# Altium PCB PCB1.PcbDoc
Units mm, origin at the board's own origin, x right, y up, seen from the top; angles counter-clockwise.
Board outline 32.2 x 66.19 mm, 2 copper layers (Top Layer, Bottom Layer); 14 components, 9 nets, 218 pads, 60 vias.
Unrouted connection lines stored in the file: 17.
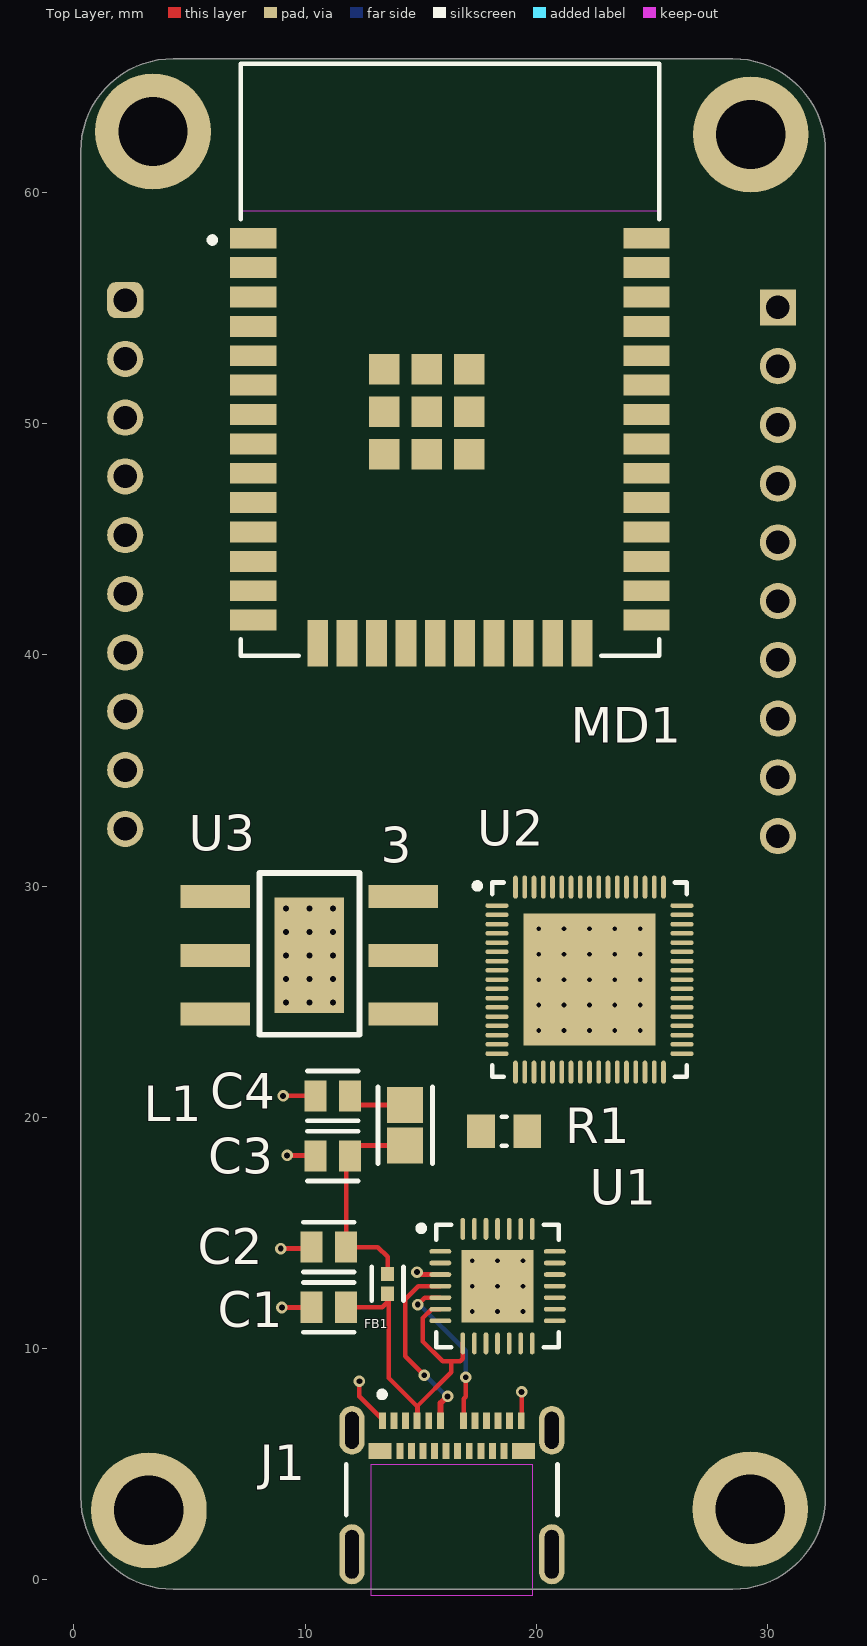
[diagram p0: Top Layer view]
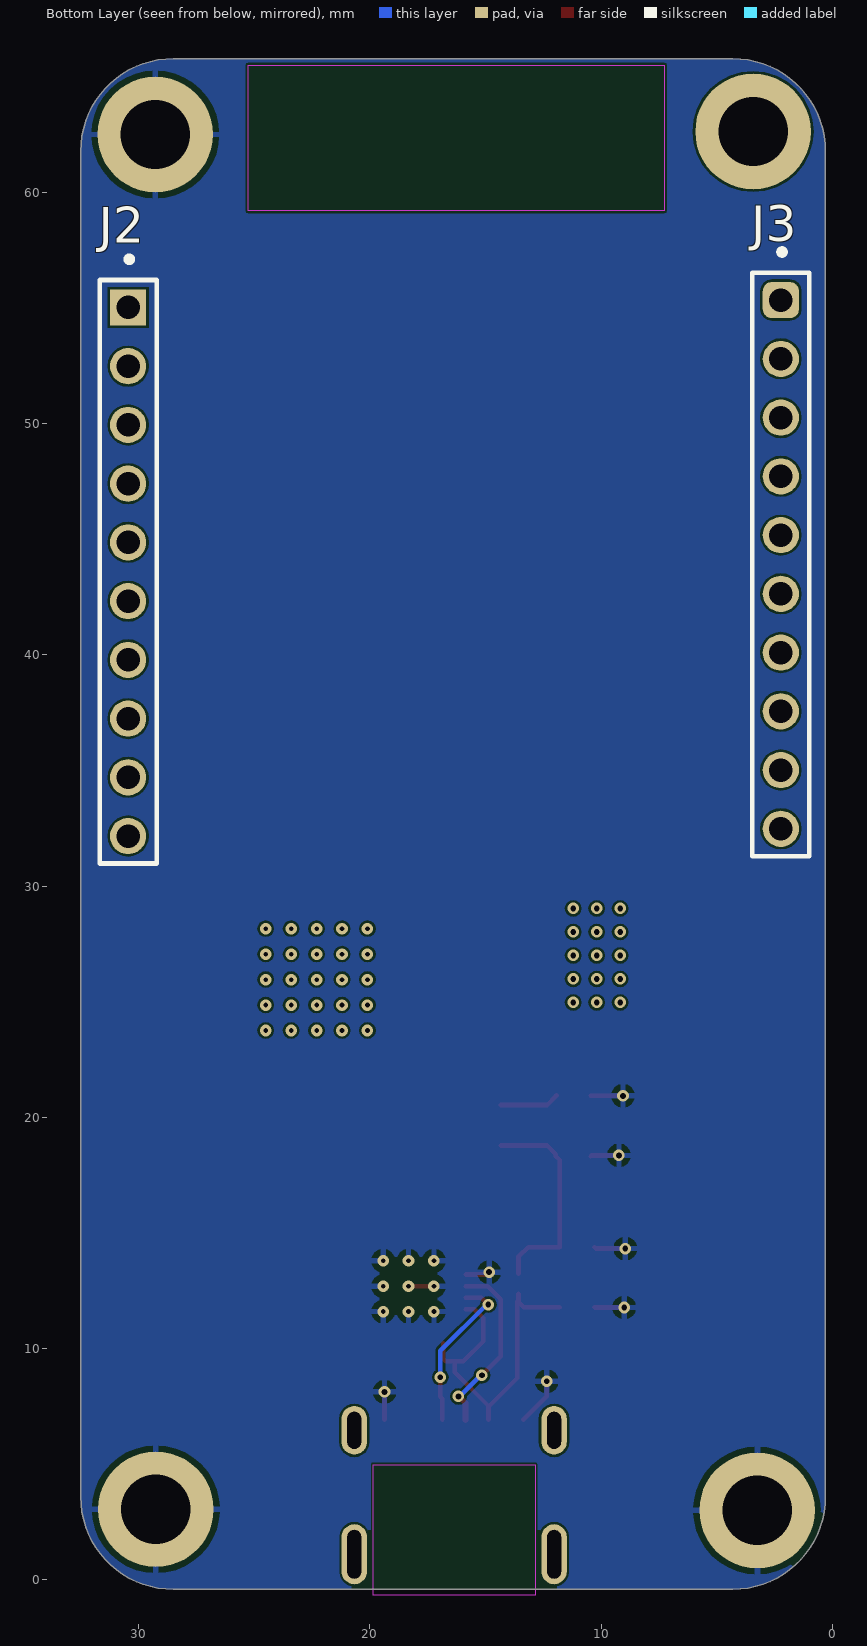
[diagram p1: Bottom Layer view, seen from below]

## Layer stack, top to bottom
Top Solder: solder mask 0.0254, SM-002, Dk 4
Top Layer: signal copper 0.0356
Dielectric 1: dielectric 0.32, FR-4, Dk 4.8
Bottom Layer: signal copper 0.0356
Bottom Solder: solder mask 0.0254, SM-002, Dk 4

## Board outline
0.3,3.59 0.3,61.775 cw(c4.3,61.775) 4.3,65.775 28.5,65.775 cw(c28.5,61.775) 32.5,61.775 32.5,3.59 cw(c28.5,3.59) 28.5,-0.41 4.3,-0.41 cw(c4.3,3.59)

## Design rules (kind name [scope] priority, off if disabled: settings)
Clearance [All] p1: gap=0.1 ignorepadtopadclearanceinfootprint=TRUE except(0: Arc-Hole Track-Hole SMDPad-Hole THPad-Hole Via-Hole Fill-Hole Poly-Hole Region-Hole Text-Hole)
HoleSize [All] p1: absolutevalues=TRUE maxlimit=5 minlimit=0.025 maxpercent=80.000 minpercent=20.000
MinimumSolderMaskSliver [All] p1: minsoldermaskwidth=0.1
PolygonConnect [All] p1: connectstyle=Relief reliefconductorwidth=0.254 reliefentries=4 polygonreliefangle="90 Angle" airgapwidth=0.254
RoutingVias [All] p1: holewidth=0.25 width=0.5 viastyle="Through Hole" minholewidth=0.25 minwidth=0.5 maxholewidth=0.25 maxwidth=0.5
SilkToSolderMaskClearance [IsPad] p1: minsilkscreentomaskgap=0.1 clearancetoexposedcopper=TRUE
SolderMaskExpansion [All] p1: expansion=0.102 istentingtop=FALSE
UnRoutedNet [All] p1: checkbadconnections=TRUE
Width [All] p1: maxlimit=0.75 minlimit=0.1 preferedwidth=0.2 minimp=50.000000 maximp=50.000000 favimp=50.000000
26 further rules are at their usual default settings.

## Components (designator, comment, footprint, x,y, rotation, side; value= is the part's Value field where it differs from the comment)
3 "LDO_AMS1117" PCBComponent_1 9.3,28.525 r0 top
C1 "C0805C104K5RACTU" FP-C0805C-DN-MFG 11.031,11.782 r180 top value="0.10 μF"
C2 "C0805C104K5RACTU" FP-C0805C-DN-MFG 11.031,14.386 r180 top value="0.10 μF"
C3 "C0805C104K5RACTU" FP-C0805C-DN-MFG 11.201,18.322 r180 top value="0.10 μF"
C4 "C0805C104K5RACTU" FP-C0805C-DN-MFG 11.201,20.926 r180 top value="0.10 μF"
FB1 "BLM15AG102SN1D" FP-BLM15-0_05-IPC_B 13.571,12.798 r90 top
J1 "1054500101" FP-1054500101-MFG 16.35,3.105 r0 top
J2 "4-644456-0" FP-4-644456-0-MFG#1 30.45,43.59 r90 bottom
J3 "4-644456-0" FP-4-644456-0-MFG#2 2.225,43.905 r90 bottom
L1 "LQM21NNR10K10D" FP-LQM21DN_00-IPC_A 14.333,19.656 r90 top
MD1 "ESP32-WROOM-32D" FP-ESP32-WROOM-32D-MFG 16.265,52.75 r0 top
R1 "RC0805FR-0710RL" RESC2013X60X35ML10T20 18.614,19.4 r180 top
U1 "CP2102-GMR" SLAB-QFN-28-3125x3125TP_M 18.325,12.7 r0 top
U2 "CY8C5888LTI-LP097" CYP-LTX68_M 22.3,25.954 r0 top

## Footprints (in the part's own frame and the unit in brackets; to place one, negate y for a bottom-side part, rotate by r counter-clockwise, add the part's x,y. Pads: shape width x height; smd on the part's side, far side on the other; paste and mask are expansions set on the pad)
CYP-LTX68_M [mm] "QFN, 68-Leads, Body 8x8mm, Pitch 0.4mm, Thermal Pad 5.7x5.7mm, IPC Low Density"
  oval 1x0.2 smd: 1(-4,3.2) 2(-4,2.8) 3(-4,2.4) 4(-4,2) 5(-4,1.6) 6(-4,1.2) 7(-4,0.8) 8(-4,0.4) 9(-4,0) 10(-4,-0.4) 11(-4,-0.8) 12(-4,-1.2) 13(-4,-1.6) 14(-4,-2) 15(-4,-2.4) 16(-4,-2.8) 17(-4,-3.2) 35(4,-3.2) 36(4,-2.8) 37(4,-2.4) 38(4,-2) 39(4,-1.6) 40(4,-1.2) 41(4,-0.8) 42(4,-0.4) 43(4,0) 44(4,0.4) 45(4,0.8) 46(4,1.2) 47(4,1.6) 48(4,2) 49(4,2.4) 50(4,2.8) 51(4,3.2)
  oval 0.2x1 smd: 18(-3.2,-4) 19(-2.8,-4) 20(-2.4,-4) 21(-2,-4) 22(-1.6,-4) 23(-1.2,-4) 24(-0.8,-4) 25(-0.4,-4) 26(0,-4) 27(0.4,-4) 28(0.8,-4) 29(1.2,-4) 30(1.6,-4) 31(2,-4) 32(2.4,-4) 33(2.8,-4) 34(3.2,-4) 52(3.2,4) 53(2.8,4) 54(2.4,4) 55(2,4) 56(1.6,4) 57(1.2,4) 58(0.8,4) 59(0.4,4) 60(0,4) 61(-0.4,4) 62(-0.8,4) 63(-1.2,4) 64(-1.6,4) 65(-2,4) 66(-2.4,4) 67(-2.8,4) 68(-3.2,4)
  rect 5.7x5.7 smd: 69(0,0)
  silkscreen extent -4.97,-4.2 4.2,4.2, body extent -4.05,-4.05 4.05,4.05, height 1
FP-4-644456-0-MFG#1 [mil]
  rect 61.65x61.65 hole 40 paste-39370.1 mask+0: 1(450,0)
  round 61.65 hole 40 paste-39370.1 mask+0: 2(350,0) 3(250,0) 4(150,0) 5(50,0) 6(-50,0) 7(-150,0) 8(-250,0) 9(-350,0) 10(-450,0)
  silkscreen extent -497,-49 537,49, body extent -494,-46 494,46, height 408
FP-4-644456-0-MFG#2 [mil]
  rrect50% 61.65x61.65 hole 40 paste-39370.1 mask+0: 1(450,0)
  round 61.65 hole 40 paste-39370.1 mask+0: 2(350,0) 3(250,0) 4(150,0) 5(50,0) 6(-50,0) 7(-150,0) 8(-250,0) 9(-350,0) 10(-450,0)
  silkscreen extent -497,-49 537,49, body extent -494,-46 494,46, height 408
FP-1054500101-MFG [mm]
  rrect100% 1.1x2.1 hole 1.6 slot 0.6 at 0 deg paste-1000 mask+0: 1(-4.32,3.36) 2(4.32,3.36)
  rrect100% 1.1x2.6 hole 2.1 slot 0.6 at 0 deg paste-1000 mask+0: 3(-4.32,-2) 4(4.32,-2)
  rect 0.3x0.7 smd paste+0 mask+0: A1(-3,3.77) A2(-2.5,3.77) A3(-2,3.77) A4(-1.5,3.77) A5(-1,3.77) A6(-0.5,3.77) A7(0.5,3.77) A8(1,3.77) A9(1.5,3.77) A10(2,3.77) A11(2.5,3.77) A12(3,3.77) B2(2.25,2.47) B3(1.75,2.47) B4(1.25,2.47) B5(0.75,2.47) B6(0.25,2.47) B7(-0.25,2.47) B8(-0.75,2.47) B9(-1.25,2.47) B10(-1.75,2.47) B11(-2.25,2.47)
  rect 1x0.7 smd paste+0 mask+0: B1(3.1,2.47) B12(-3.1,2.47)
  Keep-Out Layer region: -3.5,-3.77 3.5,-3.77 3.5,1.88 -3.5,1.88
  silkscreen extent -4.57,-0.3 4.57,5.03
FP-BLM15-0_05-IPC_B [mm]
  rect 0.615x0.572 smd paste+0 mask+0.03: 1(-0.429,0) 2(0.429,0)
  silkscreen extent -0.74,-0.69 0.74,0.69, body extent -0.89,-0.44 0.89,0.44, height 0.25
FP-C0805C-DN-MFG [mm]
  rect 0.95x1.35 smd paste+0 mask+0: 1(-0.75,0) 2(0.75,0)
  silkscreen extent -1.1,-1.07 1.1,1.07, body extent -1.4,-0.85 1.4,0.85, height 0.25
FP-ESP32-WROOM-32D-MFG [mm]
  rect 2x0.9 smd paste+0 mask+0: 1(-8.5,5.26) 2(-8.5,3.99) 3(-8.5,2.72) 4(-8.5,1.45) 5(-8.5,0.18) 6(-8.5,-1.09) 7(-8.5,-2.36) 8(-8.5,-3.63) 9(-8.5,-4.9) 10(-8.5,-6.17) 11(-8.5,-7.44) 12(-8.5,-8.71) 13(-8.5,-9.98) 14(-8.5,-11.25) 25(8.5,-11.25) 26(8.5,-9.98) 27(8.5,-8.71) 28(8.5,-7.44) 29(8.5,-6.17) 30(8.5,-4.9) 31(8.5,-3.63) 32(8.5,-2.36) 33(8.5,-1.09) 34(8.5,0.18) 35(8.5,1.45) 36(8.5,2.72) 37(8.5,3.99) 38(8.5,5.26)
  rect 0.9x2 smd paste+0 mask+0: 15(-5.715,-12.25) 16(-4.445,-12.25) 17(-3.175,-12.25) 18(-1.905,-12.25) 19(-0.635,-12.25) 20(0.635,-12.25) 21(1.905,-12.25) 22(3.175,-12.25) 23(4.445,-12.25) 24(5.715,-12.25)
  rect 1.33x1.33 smd paste+0 mask+0: 39(-2.835,-4.075) 39(-2.835,-2.24) 39(-2.835,-0.405) 39(-1,-4.075) 39(-1,-2.24) 39(-1,-0.405) 39(0.835,-4.075) 39(0.835,-2.24) 39(0.835,-0.405)
  Keep-Out Layer region: -9,6.45 9,6.45 9,12.75 -9,12.75
  Keep-Out Layer region: -9,6.45 9,6.45 9,12.75 -9,12.75
  silkscreen extent -10.4,-12.8 9.05,12.8, body extent -9.6,-13.35 9.6,12.9, height 0.25
FP-LQM21DN_00-IPC_A [mm]
  rect 1.554x1.556 smd paste+0 mask+0: 1(-0.876,0) 2(0.876,0)
  silkscreen extent -1.65,-1.18 1.65,1.18, body extent -2.15,-1.28 2.15,1.28, height 0.25
PCBComponent_1 [mm]
  rect 3x1 smd: 1(-3.175,-1.524) 1(-3.175,1.016) 2(-3.175,-4.064) 2(4.953,-4.064) 3(4.953,-1.524) 3(4.953,1.016)
  rect 3x5 smd: 3(0.889,-1.524)
  silkscreen extent -1.27,-4.95 3.05,2.03
RESC2013X60X35ML10T20 [mm] "Chip Resistor, 2-Leads, Body 2.1x1.35mm, IPC Low Density"
  rect 1.2x1.45 smd mask+0.05: 1(-1,0) 2(1,0)
  silkscreen extent -0.1,-0.63 0.1,0.63, body extent -1.05,-0.68 1.05,0.67, height 0.6
SLAB-QFN-28-3125x3125TP_M [mm] "QFN, 28-Leads, Body 5x5mm, Pitch 0.5mm, Thermal Pad 3.13x3.13mm, IPC Low Density"
  oval 0.95x0.2 smd mask+0.05: 1(-2.475,1.5) 2(-2.475,1) 3(-2.475,0.5) 4(-2.475,0) 5(-2.475,-0.5) 6(-2.475,-1) 7(-2.475,-1.5) 15(2.475,-1.5) 16(2.475,-1) 17(2.475,-0.5) 18(2.475,0) 19(2.475,0.5) 20(2.475,1) 21(2.475,1.5)
  oval 0.2x0.95 smd mask+0.05: 8(-1.5,-2.475) 9(-1,-2.475) 10(-0.5,-2.475) 11(0,-2.475) 12(0.5,-2.475) 13(1,-2.475) 14(1.5,-2.475) 22(1.5,2.475) 23(1,2.475) 24(0.5,2.475) 25(0,2.475) 26(-0.5,2.475) 27(-1,2.475) 28(-1.5,2.475)
  rect 3.13x3.13 smd: 29(0,0)
  silkscreen extent -3.42,-2.65 2.65,2.65, body extent -2.5,-2.5 2.5,2.5, height 1

## Part data
C1 C2 C3 C4: library part CMP-2007-00279-2, "CAP CER 0.1UF 50V X7R 0805", Capacitance="0.10 μF", Manufacturer=KEMET, Package=C0805C-DN, Temperature="-55°C to +125°C", Temperature Characteristic=X7R, Temperature Coefficient=30ppm/°C, Temperature Range High=+125°C, Temperature Range Low=-55°C, Tolerance=0.1, Voltage Rating="50 V", Automotive=No, Category=Cap, ComponentLink2Description=Datasheet, ComponentLink2URL=https://content.kemet.com/datasheets/KEM_C1003_C0G_SMD.pdf, Device Class L1="Passive Components", Device Class L2=Capacitors, Device Class L3="Ceramic Capacitors", Digikey Description="CAP CER 0.1UF 50V X7R 0805", Height=0.88mm, Ipc Land Pattern Name=CAPC200125X78, Lead Free=Yes, Manufacturer Part Number=C0805C104K5RACTU, Material=Ceramic, Mouser Description="Cap Ceramic 0.1uF 50V X7R 10% SMD 2.0 x 1.2 mm 125 C Paper T/R", Octopart=https://octopart.com/c0805c104k5ractu-kemet-143926, RoHS=TRUE
FB1: library part CMP-0686-00181-5, "Chip Ferrite Bead, 0402, 1000Ω @ 100MHz, 0.65Ω, 25%, 300mA", Case Code (Imperial)=0402, Case Code (Metric)=1005, Current Rating=300mA, DC Current=200mA, DC Resistance (DCR)=650mR, DC Resistance-Max=1R, Frequency=100MHz, Max Operating Temperature=125°C, Min Operating Temperature=-55°C, Package Quantity=1, Tolerance=25%, Case/Package=0402, Core Material=Ferrite, Depth=0.55mm, Height=0.5mm, Impedance=1kR, Lead Free="Lead Free", Length=1mm, Material=Ferrite, Max Current Rating=300mA, Max DC Current=200mA, Military Standard=Not, Number of Circuits=1, Number of Lines=1, Number of Pins=2, Packaging="Tape and Reel", Radiation Hardening=No, REACH SVHC="No SVHC", RoHS Compliant=Yes, Series=BLM15AG_SN, Shielding=Unshielded, Termination=SMD/SMT, Test Frequency=100MHz, Width=0.5mm
J1: library part CMP-04767-000004-1, "CONN RCP USB3.1 TYPEC 24P SMD RA", Current Rating=0.25/1.25/5A, Manufacturer=Molex, Package=0, Temperature="-30°C to +85°C", Temperature Range High=+85°C, Temperature Range Low=-30°C, Voltage Rating=30V, Automotive=No, Category=Conn, ComponentLink2Description=Datasheet, ComponentLink2URL=https://www.molex.com/webdocs/datasheets/pdf/en-us/1054500101_IO_CONNECTORS.pdf, Conn Orientation="Right Angle", Contact Material=Gold,Nickel, Device Class L1=Connectors, Device Class L2="USB Connectors", Device Class L3=unset, Digikey Description="CONN RCP USB3.1 TYPEC 24P SMD RA", Footprint Url=https://www.molex.com/pdm_docs/sd/1054500101_sd.pdf, Height=3.44mm, Is Female=yes, Lead Free=Yes, Manufacturer Part Number=1054500101, Mouser Description="USB Shielded I/O Receptacle; Type C; Right Angle; Surface Mount; Gold over Nickel", Number Of Contacts=24, Octopart=https://octopart.com/105450-0101-molex-68082325, Pitch=0.5mm, RoHS=TRUE, Shielding=true, Usb Standard="USB 3.1"
J2 J3: library part CMP-03369-000038-1, "CONN HEADER VERT 10POS 2.54MM", Current Rating=5A, Manufacturer="TE Connectivity", Temperature="-55°C to +105°C", Temperature Range High=+105°C, Temperature Range Low=-55°C, Voltage Rating=250V, Automotive=No, Category=Conn, ComponentLink2Description=Datasheet, ComponentLink2URL=https://www.te.com/commerce/DocumentDelivery/DDEController?Action=showdoc&DocId=Data+Sheet%7F82056_MTA%7F0818%7Fpdf%7FEnglish%7FENG_DS_82056_MTA_0818.pdf%7F4-644456-0, Conn Gender=Male, Conn Orientation=Vertical, Contact Material=Tin, Device Class L1=Connectors, Device Class L2="Headers and Wire Housings", Device Class L3=unset, Digikey Description="CONN HEADER VERT 10POS 2.54MM", Footprint Url=https://www.te.com/commerce/DocumentDelivery/DDEController?Action=showdoc&DocId=Customer+Drawing%7F644456%7FD2%7Fpdf%7FEnglish%7FENG_CD_644456_D2.pdf%7F4-644456-0, Height=0.408inch, Lead Free=Yes, Manufacturer Part Number=4-644456-0, Mouser Description="Headers & Wire Housings NARROW FLT HDR 10P Straight Post", Number Of Contacts=10, Number of Rows=1, Octopart=https://octopart.com/4-644456-0-te+connectivity-39514173, Package=4-644456-0, Pitch=2.54mm, RoHS=TRUE
L1: library part CMP-2000-06588-2, "Multilayer Type Inductor for General Circuits, 0805 (2012), 0.1μH, 10%, 0.26Ω, 250mA", Case Code (Imperial)=0805, Case Code (Metric)=2012, Current Rating=250mA, DC Resistance (DCR)=260mR, Inductance=100nH, Inductance Tolerance=10%, Max Operating Temperature=85°C, Min Operating Temperature=-40°C, Package Quantity=4000, Self Resonant Frequency=340MHz, Test Frequency=25MHz, Case/Package=0805, Core Material=Ferrite, DC Current=250mA, Depth=1.45mm, Height=0.85mm, Height - Seated (Max)=0.057inch, Lead Free="Lead Free", Length=2mm, Max DC Current=250mA, Military Standard=Not, Mount="Surface Mount", Packaging="Tape and Reel", Q Factor=20, Radiation Hardening=No, Rated Current-Max=250mA, REACH SVHC="No SVHC", RoHS Compliant=Yes, Series=LQM21N, Shielding=Shielded, Termination=SMD/SMT, Tolerance=10%, Width=1.25mm
MD1: library part CMP-194065-000003-1, "WIFI MODULE 32MBITS SPI FLASH", Manufacturer="Espressif Systems", Max Frequency=2484MHz, Max Supply Voltage=3.6V, Min Supply Voltage=3V, Nominal Supply Current=500mA, Temperature="-40°C to +85°C", Temperature Range High=+85°C, Temperature Range Low=-40°C, Automotive=No, Bandwidth=72MHz, Category=UNK, ComponentLink2Description=Datasheet, ComponentLink2URL=https://www.espressif.com/sites/default/files/documentation/esp32-wroom-32d_esp32-wroom-32u_datasheet_en.pdf, Data Rate=150Mbits/s, Device Class L1="Integrated Circuits (ICs)", Device Class L2="RF Semiconductors and Devices", Device Class L3=Transceivers, Digikey Description="WIFI MODULE 32MBITS SPI FLASH", Height=3.2mm, Interface=I2C,SPI,UART,Ethernet,I2S,Other, Lead Free=Yes, Manufacturer Part Number=ESP32-WROOM-32D, Mouser Description="Wi-Fi/BT BLE Module ESP32-D0WD, SPI Flash, UART, P", Number Of Adc Channels=16, Number Of Gpio=32, Octopart=https://octopart.com/esp32-wroom-32d-espressif+systems-91040050, Package=ESP32-WROOM-32D, RoHS=TRUE, Sensitivity=-98dBm
R1: library part CMP-2100-03670-1, "Chip Resistor, 10 Ohm, +/- 1%, 0.125 W, -55 to 155 degC, 0805 (2012 Metric), RoHS, Tape and Reel", Case Code (Imperial)=0805, Case Code (Metric)=2012, Manufacturer=Yageo, Max Operating Temperature=155degC, Max Power Dissipation=125mW, Min Operating Temperature=-55degC, Package Description="2-Pin Surface Mounted Device, Body 2 x 1.25 mm", Package Quantity=1, Resistance=10Ohm, Temperature Coefficient=200ppm/degreesC, Tolerance=1%, Voltage Rating=150V, Case/Package=0805, Composition=ThickFilm, Datasheet URL=http://www.yageo.com/NewPortal/yageodocoutput?fileName=/pdf/R-Chip/PYu-RC_Group_51_RoHS_L_5.pdf, Datasheet Version="Rev. 5, 10/2016", Depth=1.25mm, Height=0.5mm, Lead Free=LeadFree, Length=2mm, Manufacturer URL=http://www.yageo.com/, Number of Pins=2, Number of Terminations=2, Package Reference=0805, Packaging=TapeandReel, Power Rating=125mW, REACH SVHC=NoSVHC, RoHSCompliant=true, Termination=SMD/SMT, Voltage Rating (DC)=150V, Width=1.25mm
U1: library part CMP-2000-04924-1, "Single-Chip USB to URAT Bridge, 3.3 V, -40 to 85 degC, 28-Pin QFN, RoHS, Tape and Reel", Manufacturer="Silicon Labs", Operating Supply Voltage (Max)=3.6V, Operating Supply Voltage (Min)=3V, Operating Supply Voltage (Typ)=3.3V, Operating Temperature (Max)=85C, Operating Temperature (Min)=-40C, Operating Temperature Classification=Industrial, Package Description="28-Pin Quad-Flat No-Leads Package, Body 5 x 5 mm, Pitch 0.5 mm", Package Reference=QFN-28, Package Type=QFNEP, Supply Current=26mA, Data Rate=1000kbps, Datasheet URL=http://www.mouser.com/ds/2/368/CP2102-9-247052.pdf, Datasheet Version="Rev. 1.6, 12/2013", Interface Circuit Standard 1=RS-232, Manufacturer URL=http://www.silabs.com/, Mounting=SurfaceMount, Number of Channels=1, Package URL=http://www.silabs.com/Support%20Documents/TechnicalDocs/C8051T61x.pdf, Packaging=TapeandReel, Pin Count=28, Rad Hardened=No, Transmitter and Receiver FIFO Counter=No
U2: library part CMP-1003-00013-1, "PSoC Programmable System-on-Chip, 256 KB Flash, 38 GPIOs, 1.71 to 5.5 V, 68-Pin QFN (LTX68), Tray", Manufacturer=Cypress, Max. Operating Frequency (MHz)=80, Max. Operating Temp. (degreesC)=85, Max. Operating Voltage (V)=5.5, Min. Operating Temp. (degreesC)=-40, Min. Operating Voltage (V)=1.71, Code_JEDEC=MO-220, ComponentLink1Description="Manufacturer URL", ComponentLink1URL=http://www.cypress.com/, ComponentLink2Description=Datasheet, ComponentLink2URL=http://www.cypress.com/?docID=47570, ComponentLink3Description="Package Specification", ComponentLink3URL=http://www.cypress.com/?docID=38892, CPU Core="ARM Cortex-M3", DatasheetVersion="Rev. *E", Flash (KB)=256, Mounting Technology="Surface Mount", No. of GPIOs=38, PackageDescription="68-Pin Quad Flat No Lead, Body 8.00 x 8.00 mm, Pitch 0.40 mm", PackageReference=LTX68, PackageVersion="Rev. *E, 07/2012", Packing=Tray, PartNumber=CY8C5888LTI-LP097, SRAM (KB)=64

## Free pads (board coordinates)
  round 5 hole 3 mask+0.102: 1(3.425,62.625) 2(29.275,62.5) 3(3.25,3) 3(29.25,3.05)

## Via types
v1: diameter 0.5, hole 0.2, Top Layer to Bottom Layer, 34 vias
v2: diameter 0.5, hole 0.25, Top Layer to Bottom Layer, 26 vias

## Nets (pads, with @x,y where several pads share a name; then routed paths per layer and width w, separated by ;. In a path a pad name is that pad's centre, name@x,y a point inside that pad or via, vN(x,y) a via of type N, cw(c..) or ccw(c..) an arc to the next point about the centre after c; other vN are vias at no path point)
+5V: C4.1 L1.2 MD1.2 | length 2.6
  Top Layer w0.2: C4.1@11.92,20.957 C4.1 11.951,20.907 12.326,20.532 L1.2
GND: C1.2 C2.2 C3.2 C4.2 J1.A1 J1.A12 MD1.1 MD1.15 MD1.38 MD1.39 pad.2 pad.3 U1.3 U1.29 | length 10.7
  Top Layer w0.2: v2(8.95,14.325) 10.219,14.325 C2.2 ; v2(9,11.775) 10.274,11.775 C1.2 ; v2(9.05,20.925) 10.45,20.925 C4.2 ; v2(9.225,18.35) 10.422,18.35 C3.2 ; v2(12.352,8.582) 12.352,7.929 J1.A1@13.365,6.916 ; v2(14.841,13.306) 14.922,13.306 15.028,13.2 U1.3 ; v1(17.225,12.7) v1(18.325,12.7) ; v2(19.362,8.124) 19.364,8.123 19.364,6.917 J1.A12@19.365,6.916
  other v1: 17.225,11.6 18.325,11.6 19.425,11.6 19.425,12.7 17.225,13.8 18.325,13.8 19.425,13.8
MCU_CP2102_RX: MD1.34 U1.26
MCU_CP2102_TX: MD1.35 U1.25
Net3_1: 3.1 R1.1
NetC2_1: C2.1 C3.1 FB1.2 L1.1 | length 9.3
  Top Layer w0.2: FB1.2 13.571,13.966 13.151,14.386 C2.1 11.781,18.152 C3.1 11.951,18.405 12.326,18.78 L1.1
USB_D_N: J1.A7 U1.5 | length 7
  Top Layer w0.2: v2(14.875,11.9) 15.175,12.2 U1.5 ; J1.A7@16.865,6.916 16.865,7.826 16.949,7.911 v2(16.949,8.759)
  Bottom Layer w0.2: v2(14.875,11.9) 14.952,11.9 16.949,9.902 v2(16.949,8.759)
USB_D_P: J1.A6 U1.4 | length 7.9
  Top Layer w0.2: v2(15.151,8.844) 14.333,9.661 14.333,12.138 14.894,12.699 15.123,12.699 15.124,12.7 U1.4
  Top Layer w0.254: J1.A6@15.865,6.916 15.865,7.647 16.147,7.929 v2(16.167,7.929)
  Bottom Layer w0.2: v2(15.151,8.844) 15.202,8.844 16.116,7.929 v2(16.167,7.929)
VBUS: C1.1 FB1.1 J1.A4 U1.6 U1.8 | length 15.1
  Top Layer w0.2: C1.1 13.337,11.782 13.571,12.016 FB1.1 ; 13.625,12.016 13.625,8.728 14.865,7.488 ; J1.A4@14.865,6.916 14.865,7.488 ; U1.6 15.475,11.7 15.095,11.32 15.095,10.305 15.95,9.45 16.329,9.45 ; U1.8 16.825,9.567 16.708,9.45 16.329,9.45 ; 14.865,7.488 14.865,7.515 16.329,8.979 16.329,9.45
pads on no net: 3.2 3.3 J1.1 J1.2 J1.3 J1.4 J1.A2 J1.A3 J1.A5 J1.A8 J1.A9 J1.A10 J1.A11 J1.B1 J1.B2 J1.B3 J1.B4 J1.B5 J1.B6 J1.B7 J1.B8 J1.B9 J1.B10 J1.B11 J1.B12 J2.1 J2.2 J2.3 J2.4 J2.5 J2.6 J2.7 J2.8 J2.9 J2.10 J3.1 J3.2 J3.3 J3.4 J3.5 J3.6 J3.7 J3.8 J3.9 J3.10 MD1.3 MD1.4 MD1.5 MD1.6 MD1.7 MD1.8 MD1.9 MD1.10 MD1.11 MD1.12 MD1.13 MD1.14 MD1.16 MD1.17 MD1.18 MD1.19 MD1.20 MD1.21 MD1.22 MD1.23 MD1.24 MD1.25 MD1.26 MD1.27 MD1.28 MD1.29 MD1.30 MD1.31 MD1.32 MD1.33 MD1.36 MD1.37 R1.2 U1.1 U1.2 U1.7 U1.9 U1.10 U1.11 U1.12 U1.13 U1.14 U1.15 U1.16 U1.17 U1.18 U1.19 U1.20 U1.21 U1.22 U1.23 U1.24 U1.27 U1.28 U2.1 U2.2 U2.3 U2.4 U2.5 U2.6 U2.7 U2.8 U2.9 U2.10 U2.11 U2.12 U2.13 U2.14 U2.15 U2.16 U2.17 U2.18 U2.19 U2.20 U2.21 U2.22 U2.23 U2.24 U2.25 U2.26 U2.27 U2.28 U2.29 U2.30 U2.31 U2.32 U2.33 U2.34 U2.35 U2.36 U2.37 U2.38 U2.39 U2.40 U2.41 U2.42 U2.43 U2.44 U2.45 U2.46 U2.47 U2.48 U2.49 U2.50 U2.51 U2.52 U2.53 U2.54 U2.55 U2.56 U2.57 U2.58 U2.59 U2.60 U2.61 U2.62 U2.63 U2.64 U2.65 U2.66 U2.67 U2.68 U2.69
copper on no net:
  other v1: 20.1,23.754 21.2,23.754 22.3,23.754 23.4,23.754 24.5,23.754 20.1,24.854 21.2,24.854 22.3,24.854 23.4,24.854 24.5,24.854 20.1,25.954 21.2,25.954 22.3,25.954 23.4,25.954 24.5,25.954 20.1,27.054 21.2,27.054 22.3,27.054 23.4,27.054 24.5,27.054 20.1,28.154 21.2,28.154 22.3,28.154 23.4,28.154 24.5,28.154
  other v2: 9.173,24.969 10.189,24.969 11.205,24.969 9.173,25.985 10.189,25.985 11.205,25.985 9.173,27.001 10.189,27.001 11.205,27.001 9.173,28.017 10.189,28.017 11.205,28.017 9.173,29.033 10.189,29.033 11.205,29.033

## Polygon pours and split planes (outlines as drawn)
GND on Bottom Layer "GND_L02_P000" (solid, pour order 0): 0.3,3.59 0.3,61.775 cw(c4.3,61.775) 4.3,65.775 28.5,65.775 cw(c28.5,61.775) 32.5,61.775 32.5,3.59 cw(c28.5,3.59) 28.5,-0.41 4.3,-0.41 cw(c4.3,3.59)

## Silkscreen, mask and mechanical layers (free items; w line width, h text height)
Mechanical 1:
  the board outline again, w0.254

## Text inside footprints (layer, text, board x,y; h text height)
3: Top Overlay "U3" at 4.97,31.518 h1.52